# Altium PCB open-noise-diode.PcbDoc
Units mm, origin at the board's own origin, x right, y up, seen from the top; angles counter-clockwise.
Board outline 40 x 20 mm, 4 copper layers (Top Layer, MidLayer1, MidLayer2, Bottom Layer), stack 1.426 mm thick; 14 components, 10 nets, 47 pads, 10 vias.
Unrouted connection lines stored in the file: 32.
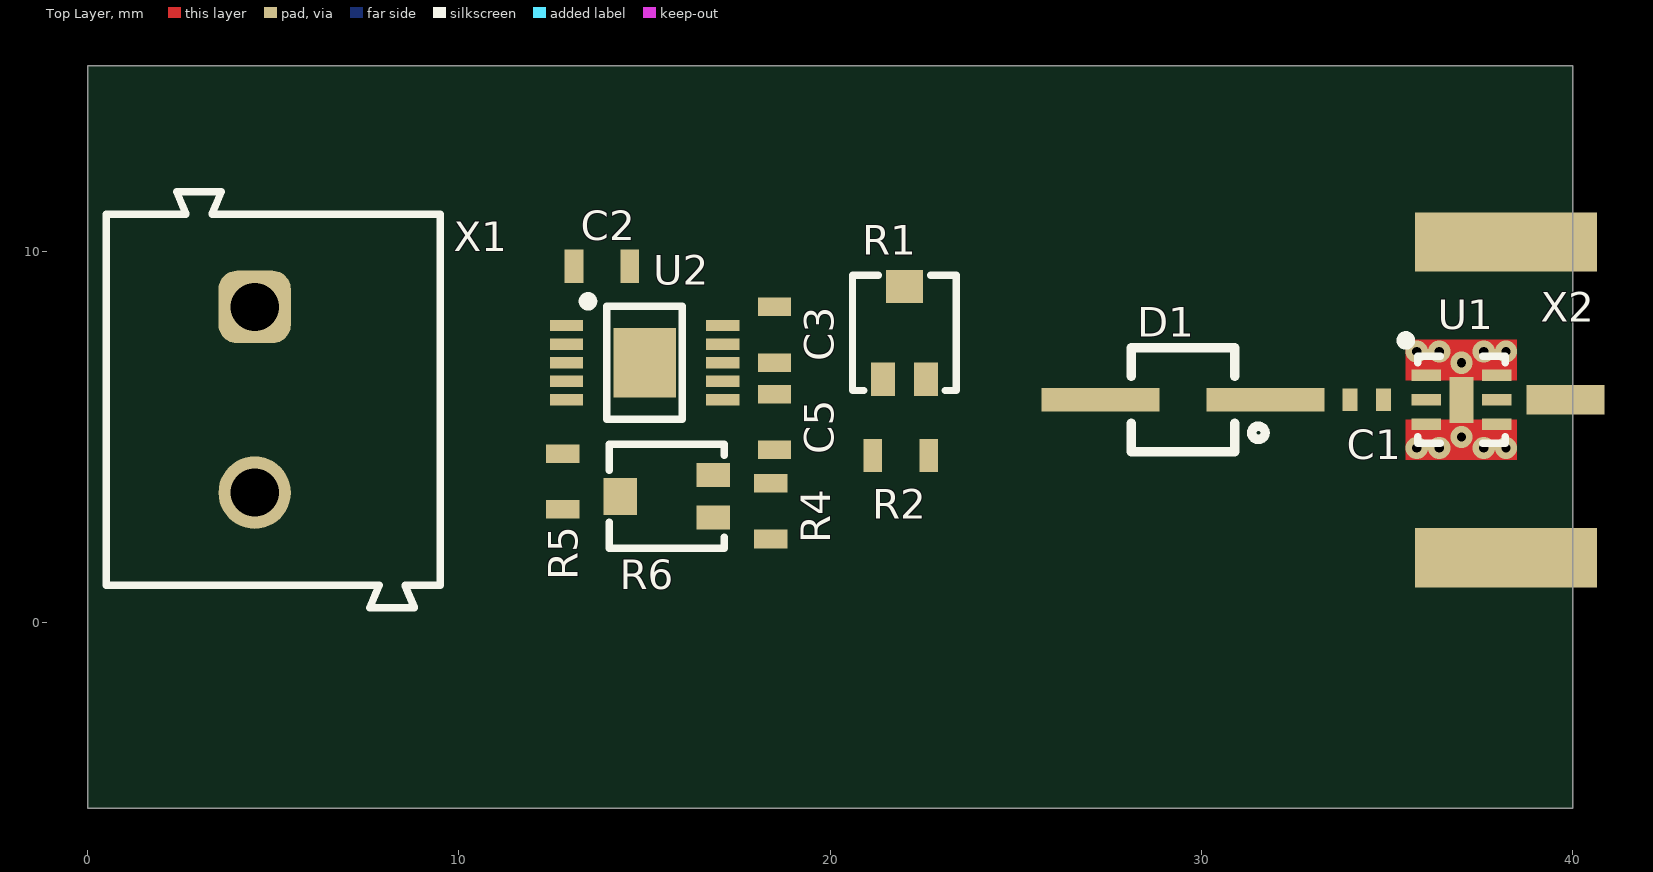
[diagram p0: Top Layer view]
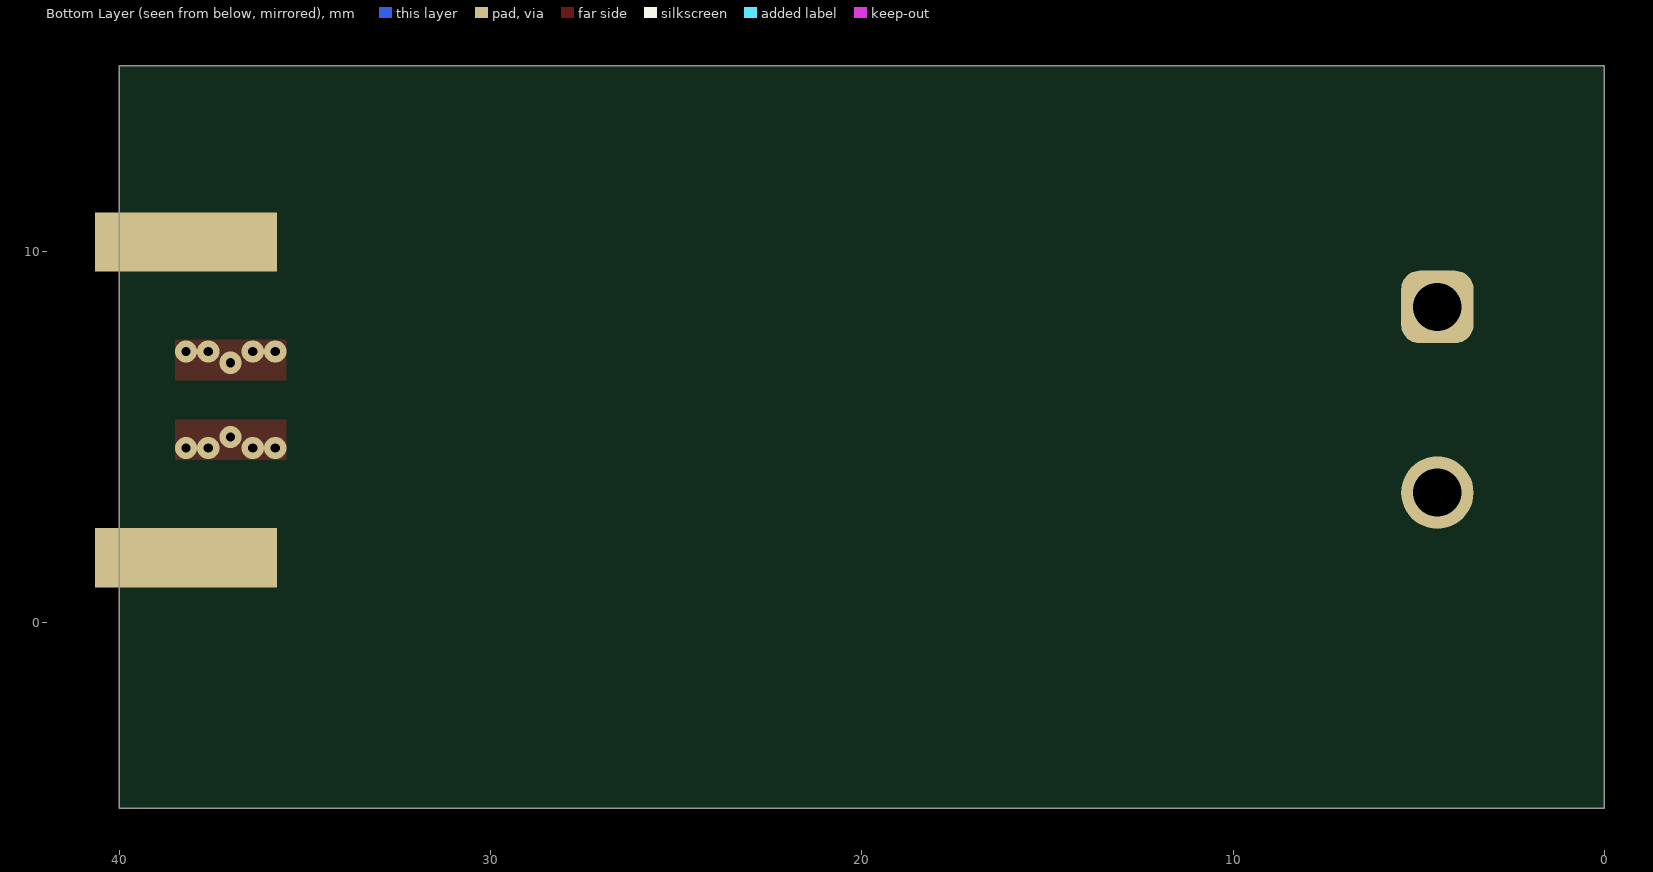
[diagram p1: Bottom Layer view, seen from below]

## Layer stack, top to bottom
Top Solder: solder mask 0.015, Solder Resist, Dk 3.5
Top Layer: signal copper 0.035
Dielectric1: core 0.288, FR-4, Dk 4.2
MidLayer1: signal copper 0.035
Dielectric 3: prepreg 0.71, Dk 4.2
MidLayer2: signal copper 0.035
Dielectric 2: core 0.288, Dk 4.2
Bottom Layer: signal copper 0.035
Bottom Solder: solder mask 0.015, Solder Resist, Dk 3.5

## Board outline
0,-5 40,-5 40,15 0,15

## Design rules (kind name [scope] priority, off if disabled: settings)
BoardOutlineClearance [All] p1: gap=0.25 ignorepadtopadclearanceinfootprint=FALSE
Clearance [All] p1: gap=0.15 ignorepadtopadclearanceinfootprint=FALSE except(0.25: Arc-Hole Track-Hole SMDPad-Hole THPad-Hole Via-Hole Fill-Hole Poly-Hole Region-Hole Text-Hole)
FabricationTestPointUsage TestPointUsage [All] p1 off: valid=0 allowmultiple=FALSE
FabricationTestpoint Testpoint [All] p1 off: side=3 testpointundercomponent=TRUE minsize=1.016 maxsize=2.54 preferedsize=1.524 minholesize=0 maxholesize=1.016 preferedholesize=0.813 testpointgrid=0.025 allowsidetop=TRUE allowsidebottom=TRUE usegrid=TRUE gridtolerance=0
FanoutControl Fanout_BGA [IsBGA] p1 off: bgadir=Out bgaviamode=Centered fanoutstyle=Auto fanoutdirection=Alternating viagrid=0.025 // Fanout_BGA (Default Rule)
FanoutControl Fanout_LCC [IsLCC] p2 off: bgadir=Out bgaviamode=Centered fanoutstyle=Auto fanoutdirection=Alternating viagrid=0.025 // Fanout_LCC (Default Rule)
FanoutControl Fanout_SOIC [IsSOIC] p3 off: bgadir=Out bgaviamode=Centered fanoutstyle=Auto fanoutdirection=Alternating viagrid=0.025 // Fanout_SOIC (Default Rule)
FanoutControl Fanout_Small [(CompPinCount < 5)] p4 off: bgadir=Out bgaviamode=Centered fanoutstyle=Auto fanoutdirection=OutThenIn viagrid=0.025 // Fanout_Small (Default Rule)
FanoutControl Fanout_Default [All] p5 off: bgadir=Out bgaviamode=Centered fanoutstyle=Auto fanoutdirection=Alternating viagrid=0.025 // Fanout_Default (Default Rule)
Height [All] p1 off: minheight=0 maxheight=25.4 prefheight=12.7
HoleSize HoleType [IsPad And HasSquareHole] p1: absolutevalues=TRUE maxlimit=0 minlimit=0 maxpercent=80.000 minpercent=20.000 // Find Square Holes
HoleSize [All] p2: absolutevalues=TRUE maxlimit=5 minlimit=0.3 maxpercent=80.000 minpercent=20.000
HoleToHoleClearance [All] p1: gap=0.45 allowstackedmicrovias=TRUE
LayerPairs [All] p1 off: enforce=TRUE
MinimumAnnularRing "Minimum Annular Ring" [All] p1: minimumring=0.175
PlaneClearance [All] p1: clearance=0.254
PlaneConnect [All] p1: planeconnectstyle=Direct reliefexpansion=0.508 reliefentries=4 reliefconductorwidth=0.254 reliefairgap=0.254
PolygonConnect PolygonConnectVia [IsVia] p1: connectstyle=Direct reliefconductorwidth=0.254 reliefentries=4 polygonreliefangle="90 Angle" airgapwidth=0.254 // Direct Connect Via
PolygonConnect [All] p2: connectstyle=Relief reliefconductorwidth=0.508 reliefentries=4 polygonreliefangle="90 Angle" airgapwidth=0.15
RoutingCorners [All] p1 off: cornerstyle=45-Degree minsetback=2.54 maxsetback=2.54
RoutingLayers [All] p1 off: top layer_v5=TRUE mid layer 1_v5=TRUE mid layer 2_v5=TRUE bottom layer_v5=TRUE
RoutingPriority [All] p1 off: routingpriority=0
RoutingTopology [All] p1 off: topology=Shortest
RoutingVias [All] p1: holewidth=0.3 width=0.65 viastyle="Through Hole" minholewidth=0.25 minwidth=0.6 maxholewidth=2 maxwidth=3
SignalStimulus "#Version Information" [All] p1 off: kind=1 level=0 starttime=10.00 stoptime=60.00 periodtime=100.0 // Version 0-9 from 2010-11-01
SilkToSilkClearance [All] p1: silktosilkclearance=0.1
SilkToSolderMaskClearance SilkscreenOverComponentPads [IsPad] p1: minsilkscreentomaskgap=0.254 clearancetoexposedcopper=TRUE
SolderMaskExpansion [All] p1: expansion=0.1 istentingtop=FALSE
Width [All] p1: maxlimit=5 minlimit=0.1 preferedwidth=0.2
11 further rules are at their usual default settings.

## Components (designator, comment, footprint, x,y, rotation, side; value= is the part's Value field where it differs from the comment)
C1 "520L103KT16T" "CAP-0402[1005] - RFL" 34.45,6 r180 top
C2 "GRM188R61E106KA73D" Generic_Cap0603_2_RW 13.85,9.6 r180 top
C3 "GRM188R61E106KA73D" Generic_Cap0603_2_RW 18.5,7.75 r90 top
C5 "UMK107B7474KA-TR" Generic_Cap0603_2_RW 18.5,5.4 r270 top
D1 "GC6001-17" Microsemi_GC6001-17_2 29.5,6 r180 top
R1 "3312J-1-502E" BOURNS_3312_3 22,7.8 r0 top
R2 "2K 1% 0603(1608)" "RES-0603[1608] - RFL" 21.9,4.5 r180 top value=2K
R4 "100K 1% 0603(1608)" "RES-0603[1608] - RFL" 18.4,3 r270 top value=100K
R5 "0R" Generic_Res0603_2_RW 12.8,3.8 r270 top
R6 "3312J-1-203E" BOURNS_3312_3 15.6,3.4 r90 top
U1 "YAT-3A+" MiniCircuit_MC1630_R 37,6 r270 top
U2 "LT3042EMSE#PBF" ANALOG_MSOP10_11 15,7 r0 top
X1 "691101710002" WURTH_691101710002_2_RWH 5,6 r270 top
X2 "73251-1150" Amphenol_SMA-EDGE-MOUNT_3_H 41,6 r0 top

## Footprints (in the part's own frame and the unit in brackets; to place one, negate y for a bottom-side part, rotate by r counter-clockwise, add the part's x,y. Pads: shape width x height; smd on the part's side, far side on the other; paste and mask are expansions set on the pad)
Amphenol_SMA-EDGE-MOUNT_3_H [mm] "mphenol_SMA-EDGE-MOUNT_3_H"
  rect 2.1x0.8 smd: 1(-1.2,0)
  rect 4.9x1.6 smd: 2(-2.8,4.25) 3(-2.8,-4.25)
  rect 4.9x1.6 smd far side: 4(-2.8,4.25) 5(-2.8,-4.25)
  body extent -4.75,-4.76 9.52,4.76, height 4.06
ANALOG_MSOP10_11 [mm] "ANALOG_MSOP10_11"
  rect 0.889x0.305 smd mask+0.05: 1(-2.105,1) 2(-2.105,0.5) 3(-2.105,0) 4(-2.105,-0.5) 5(-2.105,-1) 6(2.105,-1) 7(2.105,-0.5) 8(2.105,0) 9(2.105,0.5) 10(2.105,1)
  rect 1.68x1.88 smd mask+0.102: 11(0,0)
  silkscreen extent -1.65,-1.52 1.02,1.78, body extent -2.48,-1.55 2.48,1.55, height 1.25
BOURNS_3312_3 [mm] "BOURNS_3312_3"
  rect 0.65x0.9 smd: 1(-0.575,-1.25) 3(0.575,-1.25)
  rect 1x0.9 smd: 2(0,1.25)
  silkscreen extent -1.4,-1.55 1.4,1.55, body extent -1.25,-1.56 1.25,1.56, height 1.71
"CAP-0402[1005] - RFL" [mm] "SMD Chip 0402 - CAP - RFL"
  rect 0.4x0.6 smd: 1(-0.45,0) 2(0.45,0)
  body extent -0.5,-0.25 0.5,0.25, height 0.5
Generic_Cap0603_2_RW [mm] "Generic_Cap0603_2_RW"
  rect 0.5x0.9 smd: 1(-0.75,0) 2(0.75,0)
  body extent -0.8,-0.4 0.8,0.4, height 0.8
Generic_Res0603_2_RW [mm] "Generic_Res0603_2_RW"
  rect 0.5x0.9 smd: 1(-0.75,0) 2(0.75,0)
  body extent -0.8,-0.4 0.8,0.4, height 0.43
Microsemi_GC6001-17_2 [mil] "Microsemi_GC6001-17_2"
  rect 125x25 smd: 1(-87.5,0) 2(87.5,0)
  silkscreen extent -87,-55 55,55, body extent -50,-50 50,50, height 50
MiniCircuit_MC1630_R [mm] "MiniCircuit_MC1630_R"
  rect 0.3x0.8 smd paste+0 mask+0.05: 1(-0.66,-0.95)
  rect 0.3x0.8 smd mask+0.05: 2(0,-0.95) 3(0.66,-0.95) 4(0.66,0.95) 5(0,0.95) 6(-0.66,0.95)
  rect 1.24x0.65 smd paste-2 mask+0.05: 7(0,0)
  Top Layer region: 0.525,-1.5 1.625,-1.5 1.625,1.5 0.525,1.5
  Top Layer region: -1.625,-1.5 -0.525,-1.5 -0.525,1.5 -1.625,1.5
  silkscreen extent -1.72,-1.62 1.18,1.18, body extent -1,-1.01 1,1.01, height 0.85
"RES-0603[1608] - RFL" [mm] "SMD Chip 0603 - RES - RFL"
  rect 0.5x0.9 smd: 1(-0.75,0) 2(0.75,0)
  body extent -0.8,-0.4 0.8,0.4, height 0.43
WURTH_691101710002_2_RWH [mm] "WURTH_691101710002_2_RWH"
  rrect50% 1.95x1.95 hole 1.3: 1(-2.5,-0.5)
  round 1.95 hole 1.3: 2(2.5,-0.5)
  silkscreen extent -5.6,-4.5 5.6,4.5, body extent -5.6,-4.5 5.6,4.5, height 12.65

## Part data
C1: library part KRSA-0004-A.3, "10n, X7R, 10%, 16V, 16kHz - 16GHz, 0402", Manufacturer=ATC, Manufacturer PartNr=520L103KT16T, ShortDescription=10n
C2 C3: library part Baugruppenfertigung-0041-A.5, "10uF, X5R, 10%, 25V", Manufacturer=Murata, Manufacturer PartNr=GRM188R61E106KA73D, ShortDescription=10uF
C5: library part Baugruppenfertigung-0043-A.5, "470nF, X7R, 10%, 50V", Manufacturer="Taiyo Yuden", Manufacturer PartNr=UMK107B7474KA-TR, ShortDescription=470nF
D1: library part KRSA-0002-A.3, "Microwave Noise Diode, 0.1 - 18 GHz", Manufacturer=Microchip, Manufacturer PartNr=GC6001-17, ShortDescription=GC6001
R1: library part KRSA-0069-A.1, "SMD Trimmer, 5k, 2mm", Manufacturer=Bourns, Manufacturer PartNr=3312J-1-502E, ShortDescription=5k
R2: library part PassResBas0603-00828-A.2, "2K 0.1W 1% 0603 (1608 Metric)  SMD", ValueAddON="1% 0.1W", #Class=Passiv-Components, #SubClass="Resistor SMD", Status=nLager
R4: library part PassResBas0603-00141-A.2, "100K 0.1W 1% 0603 (1608 Metric)  SMD", ValueAddON="1% 0.1W", #Class=Passiv-Components, #SubClass="Resistor SMD", Status=nLager
R5: library part Baugruppenfertigung-0009-A.3, "0R, 1%, 0603", Manufacturer=Generic, Manufacturer PartNr=0R, ShortDescription=0R
R6: library part KRSA-0029-A.1, "SMD Trimmer, 20k, 2mm", Manufacturer=Bourns, Manufacturer PartNr=3312J-1-203E, ShortDescription=20k
U1: library part KRSA-0067-A.1, "Fixed Attenuator, DC - 18 GHz, 50R, 3dB, 2W", Manufacturer=MiniCircuits, Manufacturer PartNr=YAT-3A+, ShortDescription=YAT-3A+
U2: library part KRSA-0064-A.1, "20V, 200mA, Ultralow Noise, Ultrahigh PSRR RF Linear Regulator, ADJ", Manufacturer=Analog, Manufacturer PartNr=LT3042EMSE#PBF, ShortDescription=LT3042
X1: library part KRSA-0042-A.1, "Screw Terminal, 2 Pos, 5 mm", Manufacturer=Wurth, Manufacturer PartNr=691101710002, ShortDescription="Screw Terminal 2 Pos"
X2: library part 00000_Hilti_Localisation_MA-0044-A.5, "SMA, Female, 1.5mm Edge Mount", Manufacturer=Molex, Manufacturer PartNr=73251-1150, ShortDescription=SMA

## Via types
v1: diameter 0.6, hole 0.25, Top Layer to Bottom Layer, 10 vias

## Nets (pads, with @x,y where several pads share a name; then routed paths per layer and width w, separated by ;. In a path a pad name is that pad's centre, name@x,y a point inside that pad or via, vN(x,y) a via of type N, cw(c..) or ccw(c..) an arc to the next point about the centre after c; other vN are vias at no path point)
12V: C3.2 R1.1 R1.2 U2.9 U2.10
15V: C2.2 U2.1 U2.2 U2.3 U2.6 X1.1
GND: C2.1 C3.1 C5.2 D1.2 R5.2 R6.2 R6.3 U1.1 U1.3 U1.4 U1.6 U1.7 U2.8 U2.11 X1.2 X2.2 X2.3 X2.4 X2.5
  other v1: 35.8,4.7 36.4,4.7 37.6,4.7 38.2,4.7 37,5 37,7 35.8,7.3 36.4,7.3 37.6,7.3 38.2,7.3
NetC1_1: C1.1 U1.2
NetC1_2: C1.2 D1.1 R2.1
NetC5_1: C5.1 R4.1 U2.7
NetR1_3: R1.3 R2.2
NetR4_2: R4.2 R6.1
NetR5_1: R5.1 U2.5
NetU1_5: U1.5 X2.1
pads on no net: U2.4